# Altium PCB PCB1.PcbDoc
Units mil, origin at the board's own origin, x right, y up, seen from the top; angles counter-clockwise.
Board outline 3908.26 x 3899.5 mil, 2 copper layers (Top Layer, Bottom Layer); 71 components, 67 nets, 234 pads, 126 vias.
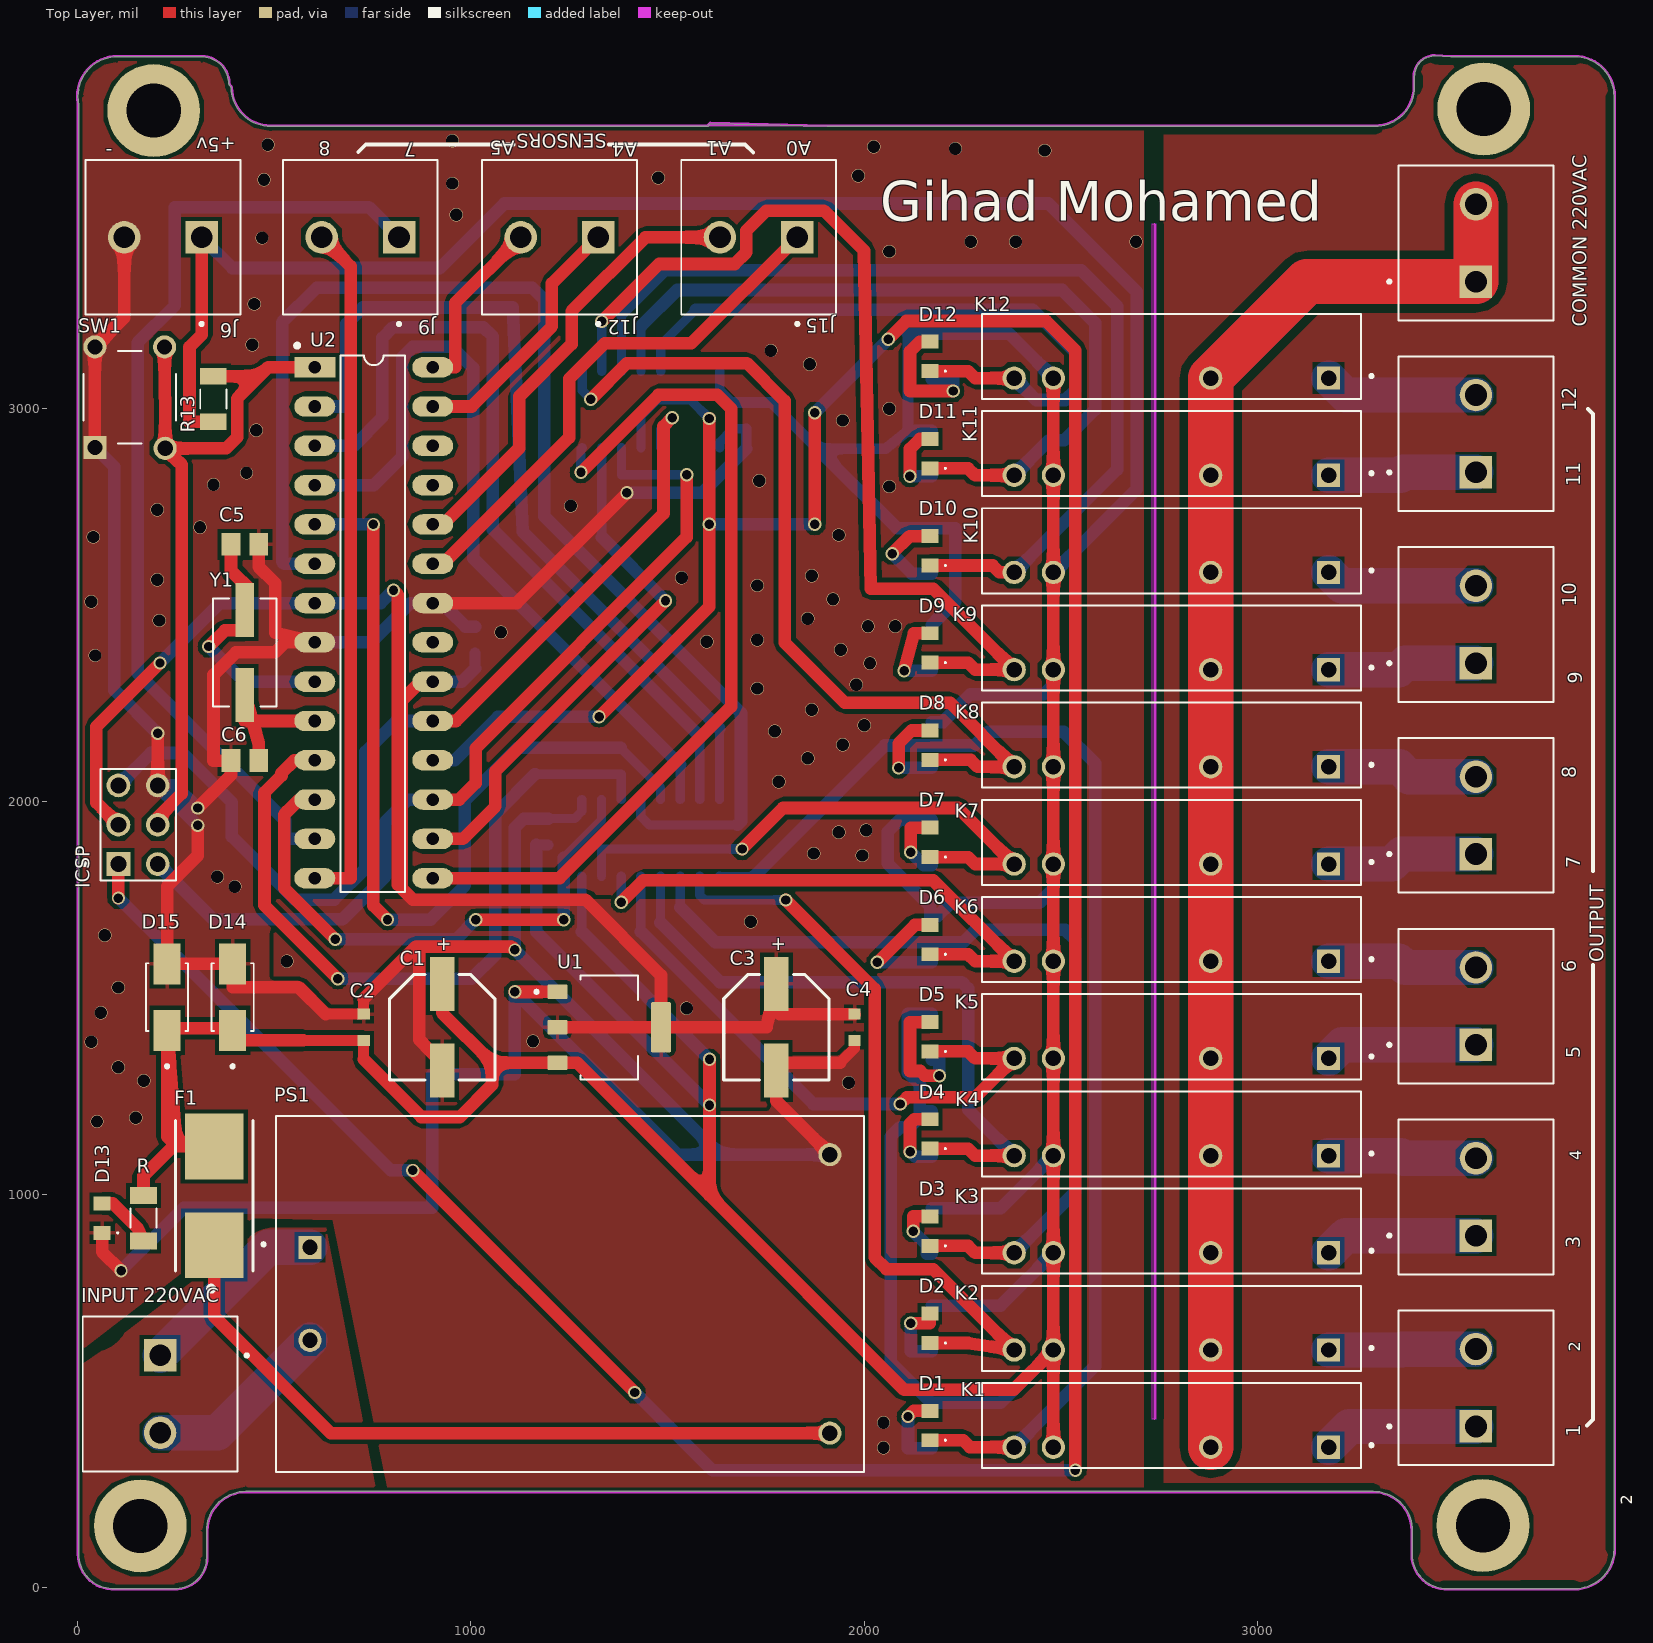
[diagram p0: Top Layer view]
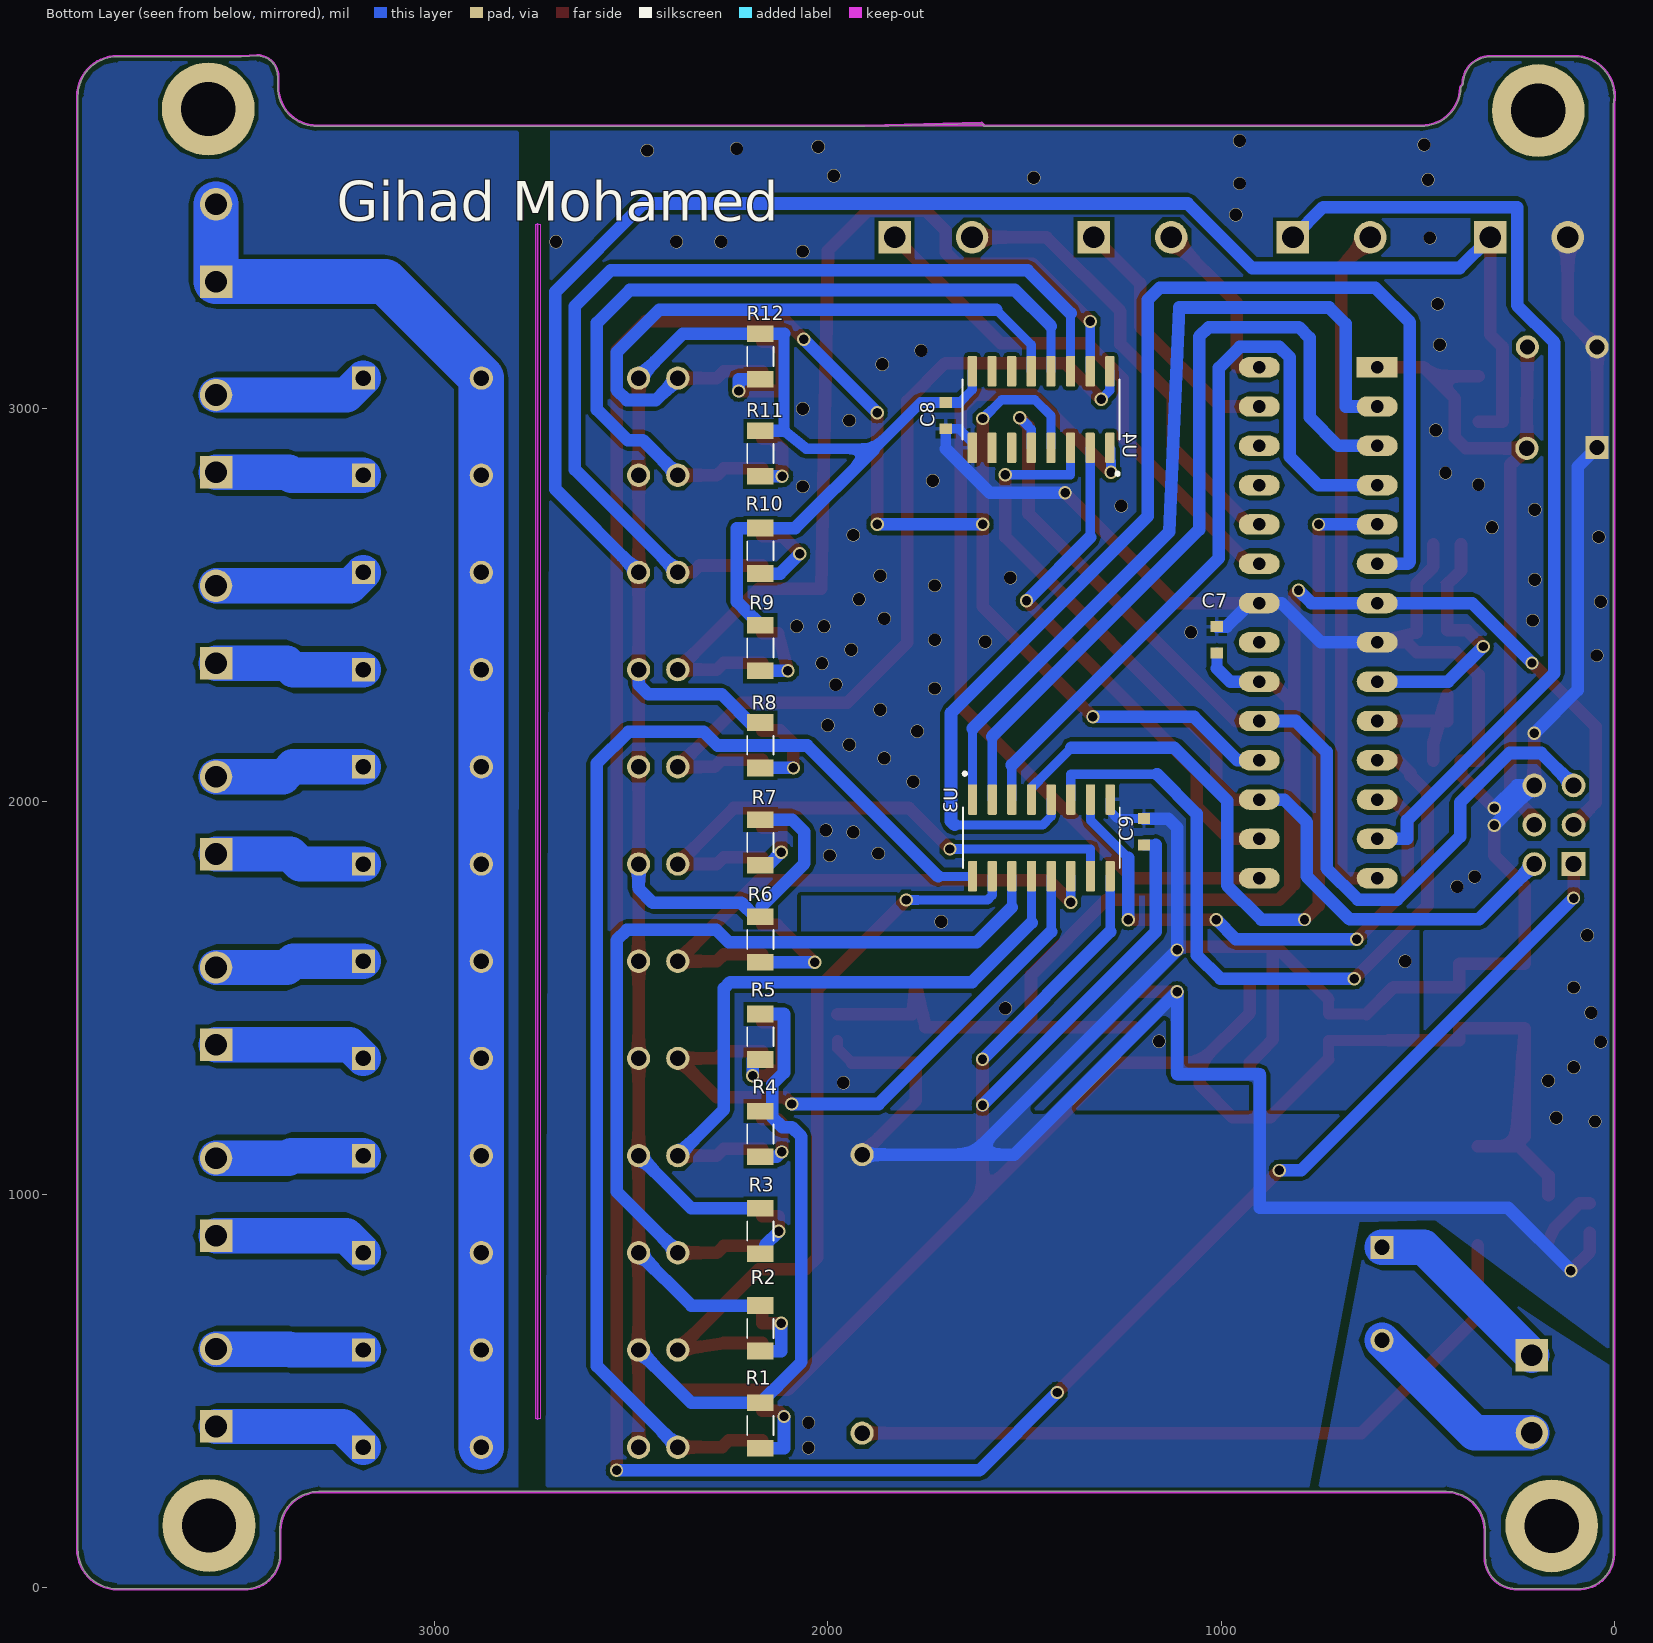
[diagram p1: Bottom Layer view, seen from below]
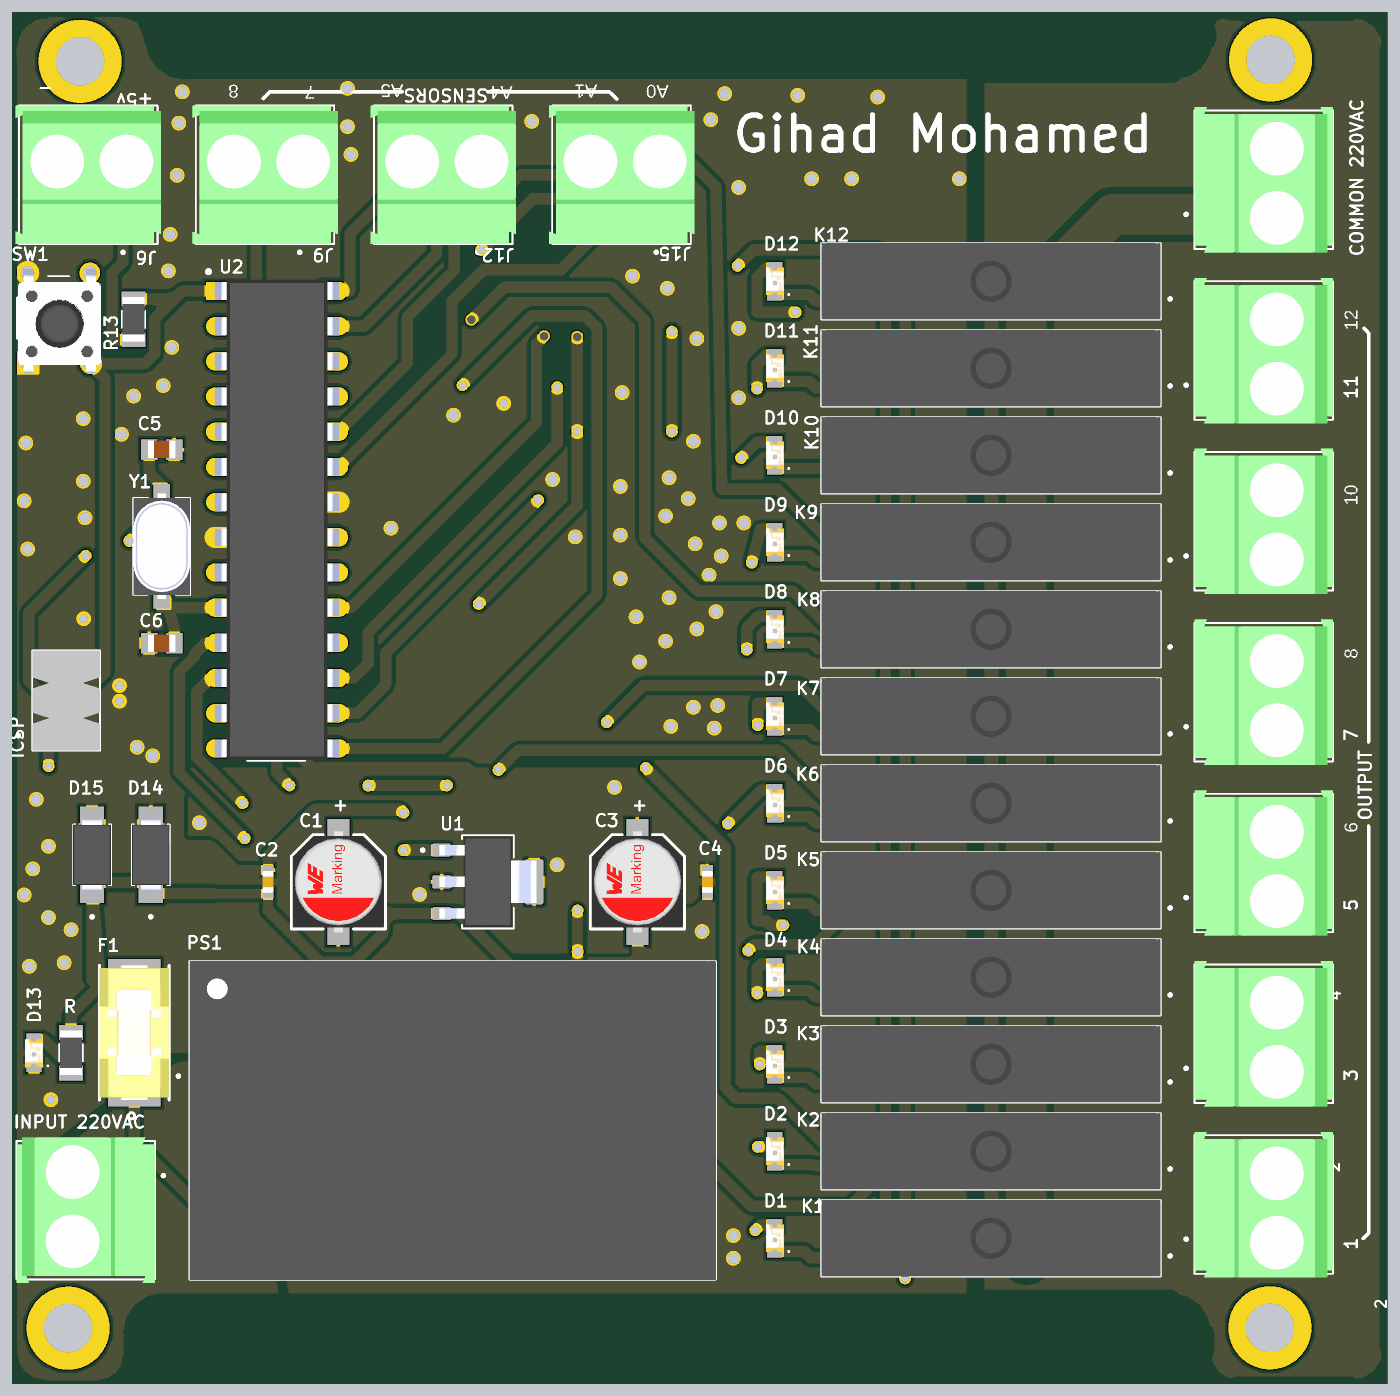
[diagram p2: 3D render of the assembled board from above, using the file's embedded part models]
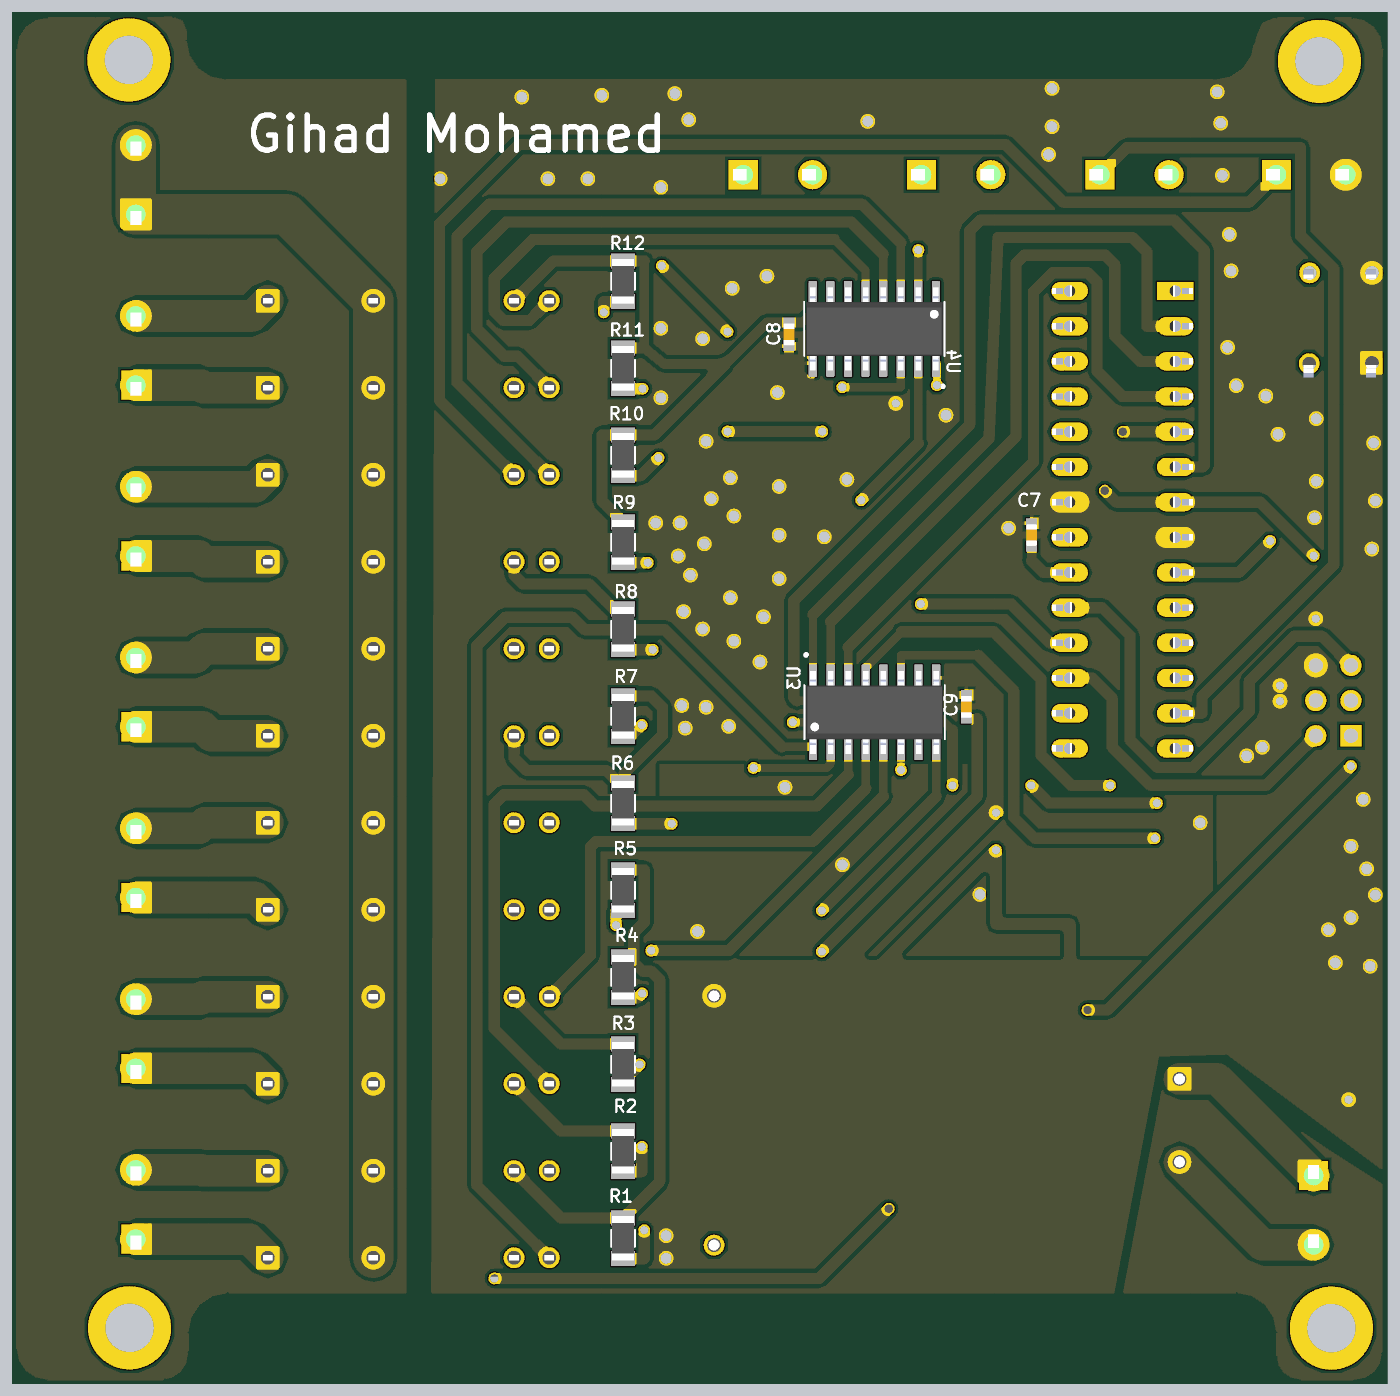
[diagram p3: 3D render of the assembled board from below, using the file's embedded part models]

## Layer stack, top to bottom
Top Solder: solder mask 0.4, Solder Resist, Dk 3.5
Top Layer: signal copper 1.4
Dielectric 1: dielectric 12.6, FR-4, Dk 4.8
Bottom Layer: signal copper 1.4
Bottom Solder: solder mask 0.4, Solder Resist, Dk 3.5

## Board outline
3808.24,-2.96 ccw(c3808.24,97.04) 3908.24,97.04 3908.24,341.68 3908.24,3543.86 3908.24,3794.27 ccw(c3808.24,3794.27) 3808.24,3894.27 3699.3,3894.27 3492.57,3894.27 3452.15,3896.54 ccw(c3452.15,3844.71) 3400.33,3844.71 3400.33,3817.49 cw(c3300.33,3817.49) 3300.33,3717.49 1904.68,3717.49 1609.28,3724.49 1602.28,3717.49 489.93,3717.49 cw(c489.93,3817.49) 389.94,3816.03 383.61,3825.17 ccw(c314.51,3825.17) 314.51,3894.27 99.99,3894.27 ccw(c99.99,3794.27) -0.01,3794.27 1.77,3770.53 1.77,85.03 ccw(c89.84,85.03) 93.57,-2.96 245.43,-2.96 ccw(c247.43,77.16) 327.55,75.18 327.55,144.35 cw(c427.53,144.36) 427.55,244.35 3295.14,244.35 cw(c3295.14,144.36) 3395.14,144.35 3395.14,90.5 ccw(c3481.95,83.85) 3475.3,-2.96
cut-out: 2732.17,429 2743.5,429 2743.5,3444.85 2743.5,3468.13 2743.88,3468.51 2732.17,3468.51

## Design rules (kind name [scope] priority, off if disabled: settings)
Clearance Clearance_1 [InNamedPolygon('NONET_L02_P034') vs InNet('No Net') And OnLayer('Top Layer')] p1: gap=10 ignorepadtopadclearanceinfootprint=FALSE except(0: Arc-Hole Track-Hole SMDPad-Hole THPad-Hole Via-Hole Fill-Hole Poly-Hole Region-Hole Text-Hole; 20: Track-Poly)
Clearance NONET_L01_P032 [InNamedPolygon('NONET_L01_P032')] p2: gap=10 ignorepadtopadclearanceinfootprint=FALSE except(0: Arc-Hole Track-Hole SMDPad-Hole THPad-Hole Via-Hole Fill-Hole Poly-Hole Region-Hole Text-Hole; 20: Track-Poly)
Clearance [All] p3: gap=10 ignorepadtopadclearanceinfootprint=FALSE except(0: Text-Text; 5: THPad-Via; 18: Arc-Arc Arc-Track Track-Track)
HoleSize [All] p1: absolutevalues=TRUE maxlimit=137.8 minlimit=11.81 maxpercent=80.000 minpercent=20.000
MinimumSolderMaskSliver [All] p1: minsoldermaskwidth=1
PolygonConnect [All] p1: thpad.connectstyle=Direct thpad.reliefconductorwidth=10 thpad.reliefentries=4 thpad.polygonreliefangle="90 Angle" thpad.airgapwidth=10 smdpad.connectstyle=Relief smdpad.reliefconductorwidth=10 smdpad.reliefentries=4 smdpad.polygonreliefangle="90 Angle" smdpad.airgapwidth=10 via.connectstyle=Direct via.reliefconductorwidth=10 via.reliefentries=4 via.polygonreliefangle="90 Angle" via.airgapwidth=10
RoutingVias [All] p1: holewidth=24 width=33.8 viastyle="Through Hole" minholewidth=24 minwidth=33.8 maxholewidth=31.5 maxwidth=33.8
SMDNeckDown [All] p1: percent=150.000
SilkToSilkClearance [All] p1: silktosilkclearance=0
SilkToSolderMaskClearance [IsPad] p1: minsilkscreentomaskgap=1 clearancetoexposedcopper=TRUE
SolderMaskExpansion [All] p1: expansion=4 istentingtop=FALSE
Width [All] p1: maxlimit=115 minlimit=16 preferedwidth=32 minimp=50.000000 maximp=50.000000 favimp=50.000000
26 further rules are at their usual default settings.

## Classes and differential pairs
component class control: C5 C6 C7 C8 C9 ICSP R13 SW1 U2 U3 U4 Y1
component class output: 1 3 5 7 9 11 "COMMON 220VAC" D1 D2 D3 D4 D5 D6 D7 D8 D9 D10 D11 D12 J6 J9 J12 J15 K1 K2 K3 K4 K5 K6 K7 K8 K9 K10 K11 K12 R1 R2 R3 R4 R5 R6 R7 R8 R9 R10 R11 R12
component class input: C1 C2 C3 C4 D13 D14 D15 F1 "INPUT 220VAC" PS1 R U1

## Components (designator, comment, footprint, x,y, rotation, side; value= is the part's Value field where it differs from the comment)
1 "282856-2" TE_282856-2 3556.85,508.12 r90 top
3 "282856-2" TE_282856-2 3556.85,993.57 r90 top
5 "282856-2" TE_282856-2 3556.85,1479.01 r90 top
7 "282856-2" TE_282856-2 3556.85,1964.45 r90 top
9 "282856-2" TE_282856-2 3556.85,2449.89 r90 top
11 "282856-2" TE_282856-2 3556.85,2935.33 r90 top
C1 "47uF" WCAP-ASLI_D6.3H7.7 926.85,1425.25 r90 top
C2 "100nF" WCAP-CSGP_0603_L1.6W0.8H0.8_Wave 726.85,1425.25 r270 top
C3 "47uF" WCAP-ASLI_D6.3H7.7 1776.85,1425.25 r90 top
C4 "100nF" WCAP-CSGP_0603_L1.6W0.8H0.8_Wave 1975.81,1425.25 r90 top
C5 "22pF" CAPC2012X130N 424.76,2653.82 r180 top value=C?
C6 "22pF" CAPC2012X130N 424.76,2103.82 r0 top
C7 "100nF" WCAP-CSGP_0603_L1.6W0.8H0.8_Wave 1010.58,2411.15 r270 bottom
C8 "100nF" WCAP-CSGP_0603_L1.6W0.8H0.8_Wave 1700.26,2981.39 r90 bottom
C9 "100nF" WCAP-CSGP_0603_L1.6W0.8H0.8_Wave 1195.93,1922.67 r270 bottom
"COMMON 220VAC" "282856-2" TE_282856-2 3556.85,3420.77 r90 top
D1 "Infrared, 1.4V, 140°" WL-SICW_0805_L2W1.3H0.8 2167.42,412.04 r90 top
D2 "Infrared, 1.4V, 140°" WL-SICW_0805_L2W1.3H0.8 2167.42,659.31 r90 top
D3 "Infrared, 1.4V, 140°" WL-SICW_0805_L2W1.3H0.8 2167.42,906.59 r90 top
D4 "Infrared, 1.4V, 140°" WL-SICW_0805_L2W1.3H0.8 2167.42,1153.86 r90 top
D5 "Infrared, 1.4V, 140°" WL-SICW_0805_L2W1.3H0.8 2167.42,1401.13 r90 top
D6 "Infrared, 1.4V, 140°" WL-SICW_0805_L2W1.3H0.8 2167.42,1648.41 r90 top
D7 "Infrared, 1.4V, 140°" WL-SICW_0805_L2W1.3H0.8 2167.42,1895.68 r90 top
D8 "Infrared, 1.4V, 140°" WL-SICW_0805_L2W1.3H0.8 2167.42,2142.95 r90 top
D9 "Infrared, 1.4V, 140°" WL-SICW_0805_L2W1.3H0.8 2167.42,2390.22 r90 top
D10 "Infrared, 1.4V, 140°" WL-SICW_0805_L2W1.3H0.8 2167.42,2637.5 r90 top
D11 "Infrared, 1.4V, 140°" WL-SICW_0805_L2W1.3H0.8 2167.42,2884.77 r90 top
D12 "Infrared, 1.4V, 140°" WL-SICW_0805_L2W1.3H0.8 2167.42,3132.04 r90 top
D13 "Infrared, 1.4V, 140°" WL-SICW_0805_L2W1.3H0.8 61.85,939.64 r90 top
D14 "S1G" DIO_S1G 393.66,1502.04 r90 top
D15 "S1G" DIO_S1G 226.85,1502.04 r90 top
F1 "0154004.DR" FUSE_0154004.DR 346.85,996.45 r90 top
ICSP "5-146257-3" TE_5-146257-3 153.09,1940.53 r90 top
"INPUT 220VAC" "282856-2" TE_282856-2 209.13,492.04 r270 top
J6 "282856-2" TE_282856-2 216.32,3435.11 r180 top
J9 "282856-2" TE_282856-2 718.52,3435.11 r180 top
J12 "282856-2" TE_282856-2 1225.19,3435.11 r180 top
J15 "282856-2" TE_282856-2 1731.85,3435.11 r180 top
K1 "Relay 5vDC/220AC" RELAY_G3MB-202PDC5 2781.85,412.04 r180 top
K2 "Relay 5vDC/220AC" RELAY_G3MB-202PDC5 2781.85,659.31 r180 top
K3 "Relay 5vDC/220AC" RELAY_G3MB-202PDC5 2781.85,906.59 r180 top
K4 "Relay 5vDC/220AC" RELAY_G3MB-202PDC5 2781.85,1153.86 r180 top
K5 "Relay 5vDC/220AC" RELAY_G3MB-202PDC5 2781.85,1401.13 r180 top
K6 "Relay 5vDC/220AC" RELAY_G3MB-202PDC5 2781.85,1648.41 r180 top
K7 "Relay 5vDC/220AC" RELAY_G3MB-202PDC5 2781.85,1895.68 r180 top
K8 "Relay 5vDC/220AC" RELAY_G3MB-202PDC5 2781.85,2142.95 r180 top
K9 "Relay 5vDC/220AC" RELAY_G3MB-202PDC5 2781.85,2390.22 r180 top
K10 "Relay 5vDC/220AC" RELAY_G3MB-202PDC5 2781.85,2637.5 r180 top
K11 "Relay 5vDC/220AC" RELAY_G3MB-202PDC5 2781.85,2884.77 r180 top
K12 "Relay 5vDC/220AC" RELAY_G3MB-202PDC5 2781.85,3132.04 r180 top
PS1 "HLK-5M05" CONV_HLK-5M05 1251.85,747.04 r0 top
R "FCR1206J10R" RESC3216X70N 166.85,939.64 r270 top
R1 "1k" RESC3216X70N 2171.85,412.04 r90 bottom
R2 "1k" RESC3216X70N 2171.85,659.31 r90 bottom
R3 "1k" RESC3216X70N 2171.85,906.59 r90 bottom
R4 "1k" RESC3216X70N 2171.85,1153.86 r90 bottom
R5 "1k" RESC3216X70N 2171.85,1401.13 r90 bottom
R6 "1k" RESC3216X70N 2171.85,1648.41 r90 bottom
R7 "1k" RESC3216X70N 2171.85,1895.68 r90 bottom
R8 "1k" RESC3216X70N 2171.85,2142.95 r90 bottom
R9 "1k" RESC3216X70N 2171.85,2390.22 r90 bottom
R10 "1k" RESC3216X70N 2171.85,2637.5 r90 bottom
R11 "1k" RESC3216X70N 2171.85,2884.77 r90 bottom
R12 "1k" RESC3216X70N 2171.85,3132.04 r90 bottom
R13 "10k" RESC3216X70N 344.69,3023.88 r90 top
SW1 "3-1825910-1" TE_3-1825910-1 131.85,3028.16 r90 top
U1 "AMS1117" SOT229P700X180-4N 1351.85,1425.25 r0 top
U2 "ATMEGA328P-PU" DIL28 752.71,2454.53 r0 top
U3 "ULN2003AD" SOIC127P600X175-16N 1457.1,1907.25 r270 bottom
U4 "ULN2003AD" SOIC127P600X175-16N 1457.75,2996.81 r90 bottom
Y1 "" XTAL_ECS-160-20-3X-TR 424.76,2378.82 r90 top

## Footprints (in the part's own frame and the unit in brackets; to place one, negate y for a bottom-side part, rotate by r counter-clockwise, add the part's x,y. Pads: shape width x height; smd on the part's side, far side on the other; paste and mask are expansions set on the pad)
CAPC2012X130N [mm]
  rect 1.21x1.47 smd: 1(-0.898,0) 2(0.898,0)
  body extent -1,-0.66 1,0.64, height 1.26
CONV_HLK-5M05 [mm]
  rect 1.5x1.5 / inner round 1.5 / far side rect 1.5x1.5 hole 1: 1(-16.8,3)
  round 1.5 hole 1: 2(-16.8,-3) 3(16.8,9) 4(16.8,-9)
  silkscreen extent -19.9,-11.5 19,11.5, body extent -19,-11.5 19,11.5, height 18.01
DIL28 [mil]
  rect 104x52 hole 32 paste-99999: 1(-150,650)
  oval 104x52 hole 32: 2(-150,550) 3(-150,450) 4(-150,350) 5(-150,250) 6(-150,150) 7(-150,50) 8(-150,-50) 9(-150,-150) 10(-150,-250) 11(-150,-350) 12(-150,-450) 13(-150,-550) 14(-150,-650) 15(150,-650) 16(150,-550) 17(150,-450) 18(150,-350) 19(150,-250) 20(150,-150) 21(150,-50) 22(150,50) 23(150,150) 24(150,250) 25(150,350) 26(150,450) 27(150,550) 28(150,650)
  silkscreen extent -200,-685 80,710, body extent -200,-682 200,682, height 180
DIO_S1G [mm]
  rect 2.65x1.75 smd: 1(-2.15,0) 2(2.15,0)
  silkscreen extent -4.57,-1.36 2.19,1.36, body extent -2.6,-1.36 2.6,1.36, height 2.7
FUSE_0154004.DR [mm]
  rect 4.24x3.81 smd: 1(-3.19,0) 2(3.19,0)
  silkscreen extent -6.22,-2.52 4.86,2.52, body extent -4.86,-2.51 4.86,2.51, height 3.81
RELAY_G3MB-202PDC5 [mm]
  rect 1.508x1.508 hole 1: 1(-10.16,1.4)
  round 1.508 hole 1: 2(-2.54,1.4) 3(7.62,1.4) 4(10.16,1.4)
  silkscreen extent -13.03,-2.75 12.25,2.75, body extent -12.25,-2.75 12.25,2.75, height 20.5
RESC3216X70N [mm]
  rect 1.08x1.72 smd: 1(-1.47,0) 2(1.47,0)
  silkscreen extent -0.61,-0.85 0.61,0.85, body extent -1.6,-0.8 1.6,0.8, height 0.71
SOIC127P600X175-16N [mm]
  rrect25% 1.97x0.6 smd: 1(-2.475,-4.445) 2(-2.475,-3.175) 3(-2.475,-1.905) 4(-2.475,-0.635) 5(-2.475,0.635) 6(-2.475,1.905) 7(-2.475,3.175) 8(-2.475,4.445) 9(2.475,4.445) 10(2.475,3.175) 11(2.475,1.905) 12(2.475,0.635) 13(2.475,-0.635) 14(2.475,-1.905) 15(2.475,-3.175) 16(2.475,-4.445)
  silkscreen extent -4.24,-5.06 1.95,5.06, body extent -3,-4.95 3,4.95, height 1.75
SOT229P700X180-4N [mm]
  rrect15% 1.31x0.93 smd: 1(-3.345,2.29) 2(-3.345,0) 3(-3.345,-2.29)
  rrect15% 1.31x3.24 smd: 4(3.345,0)
  silkscreen extent -4.8,-3.36 1.86,3.36, body extent -3.5,-3.25 3.5,3.25, height 1.8
TE_3-1825910-1 [mm]
  rect 1.498x1.498 / inner round 1.498 / far side rect 1.498x1.498 hole 0.99: 1(-3.25,2.25)
  round 1.498 hole 0.99: 2(3.25,2.25) 3(-3.302,-2.286) 4(3.25,-2.25)
  silkscreen extent -3,-3 3,3, body extent -4.32,-3.07 3.48,2.92, height 17.01
TE_5-146257-3 [mm]
  rect 1.53x1.53 / inner round 1.53 / far side rect 1.53x1.53 hole 1.02: 1(-2.54,1.27)
  round 1.53 hole 1.02: 2(0,1.27) 3(2.54,1.27) 4(-2.54,-1.27) 5(0,-1.27) 6(2.54,-1.27)
  silkscreen extent -3.61,-2.44 3.61,3.54, body extent -3.61,-2.44 3.61,2.44, height 8.38
TE_282856-2 [mm]
  rect 2.1x2.1 / inner round 2.1 / far side rect 2.1x2.1 hole 1.4: 1(-2.5,0)
  round 2.1 hole 1.4: 2(2.5,0)
  silkscreen extent -5,-5 5,5.7, body extent -5.25,-5 5.25,5, height 19
WCAP-ASLI_D6.3H7.7 [mm] "Aluminium Electrolytic V-Chip SMT Capacitors, 6.3x7.7mm"
  rect 3.5x1.6 smd: 1(2.8,0) 2(-2.8,0)
  silkscreen extent -3.4,-3.4 3.4,3.4, body extent -3.65,-3.3 3.65,3.3, height 7.7
WCAP-CSGP_0603_L1.6W0.8H0.8_Wave [mm] "Ceramic Capacitors, 0603, body 1.6x0.8mm"
  rect 0.7x0.8 smd: 1(-0.85,0) 2(0.85,0)
  body extent -0.8,-0.4 0.8,0.4, height 0.8
WL-SICW_0805_L2W1.3H0.8 [mm] "SMT Infrared Chip LED Waterclear, body 2x1.3mm"
  rect 0.9x1.1 smd: 1(-0.95,0) 2(0.95,0)
  silkscreen extent -1,-1.05 -0.9,-0.95, body extent -1,-0.65 1,0.65, height 0.8
XTAL_ECS-160-20-3X-TR [mm]
  rect 3.5x1.2 smd: 1(-2.75,0) 2(2.75,0)
  silkscreen extent -3.5,-2.05 3.5,2.05, body extent -3.8,-2.05 3.8,2.05, height 2.31

## Part data
1 3 5 7 9 11 "COMMON 220VAC" "INPUT 220VAC" J6 J9 J12 J15: "TERMI-BLOK PCB MOUNT 2P", Package=None, Availability="In Stock", Check_prices=https://www.snapeda.com/parts/282856-2/TE+Connectivity+AMP+Connectors/view-part/?ref=eda, EU_RoHS_Compliance="Compliant with Exemptions", MF="TE Connectivity", MP=282856-2, Price=None, Purchase-URL=https://pricing.snapeda.com/search/part/282856-2/?ref=eda, SnapEDA_Link=https://www.snapeda.com/parts/282856-2/TE+Connectivity+AMP+Connectors/view-part/?ref=snap
C1 C3: library part 865080443007, "WCAP-ASLI Aluminum Electrolytic Capacitor, V-Chip, D6.3 x H5.5mm, 47uF, 25V", Capacitance Tolerance=+/-20%, Leakage Current=11.75uA, Manufacturer="Wurth Elektronik", Operating Temperature Max=105°C, Operating Temperature Min=-55°C, Rated Voltage (DC)=25V, Ripple Current=220mA, Capacitance=47uF, Category="Aluminum Electrolytic Capacitors", ComponentLink1Description="Website Link", ComponentLink1URL=https://www.we-online.com/redexpert/article/865080443007?ad, ComponentLink2Description="Datasheet Link", ComponentLink2URL=https://www.we-online.com/redexpert/spec/865080443007?ad, Diameter=6.3mm, Dissipation Factor=14%, Endurance=2000h, Height=5.5mm, Manufacturer Part Number=865080443007, Match Code=WCAP-ASLI, Mount="Surface Mount", Packaging="Tape and Reel", Technical Reference=ASED055470M025DVCTBB000
C2 C4 C7 C8 C9: library part 885012206071, "WCAP-CSGP Multilayer Ceramic Chip Capacitor, General Purpose, size 0603, X7R, 100nF, 25VDC", Capacitance Tolerance=+/-10%, Case/Size Code=0603, Insulation Resistance=5GΩ, Manufacturer="Wurth Elektronik", Operating Temperature Max=125°C, Operating Temperature Min=-55°C, Rated Voltage (DC)=25V, Capacitance=100nF, Category="Multilayer Ceramic Chip Capacitors", Ceramic Type=X7R, ComponentLink1Description="Website Link", ComponentLink1URL=https://www.we-online.com/redexpert/article/885012206071?ad, ComponentLink2Description="Datasheet Link", ComponentLink2URL=https://www.we-online.com/redexpert/spec/885012206071?ad, Dissipation Factor=3.5%, Height=0.8mm, Length=1.6mm, Manufacturer Part Number=885012206071, Match Code=WCAP-CSGP, Mount="Surface Mount", Packaging="Tape and Reel", Technical Reference=X7R0603104K025DFCT10000, Width=0.8mm
C5 C6: library part 0805Y0500220JCT, "Cap Cer 22pf 50v C0g/Np0 0805", Package="2012 Knowles Syfer", Availability=Warning, BuyPart=https://www.snapeda.com/parts/0805Y0500220JCT/Syfer/view-part/1818858/?ref=eda, MF=Syfer, Mouser-Purchase-URL=https://snapeda.com/shop?store=Mouser&id=1818858, MP=0805Y0500220JCT, Price=None, SnapEDA_Link=https://www.snapeda.com/parts/0805Y0500220JCT/Syfer/view-part/1818858/?ref=snap
D1 D2 D3 D4 D5 D6 D7 D8 D9 D10 D11 D12 D13: library part 15412085BA400, "WL-SICW SMT Chip LED Infrared Waterclear, size 1206, Infrared, 1.4V, 140°", Case/Size Code=1206, Emitting Color=Infrared, Forward Voltage=1.4V, Forward Voltage Max=2V, Manufacturer="Wurth Elektronik", Operating Temperature Max=85°C, Operating Temperature Min=-40°C, Category="Infrared LEDs", Centroid Wavelength=850nm, Chip Technology=AlGaAs, ComponentLink1Description="Website Link", ComponentLink1URL=https://www.we-online.com/redexpert/article/15412085BA400?ad, ComponentLink2Description="Datasheet Link", ComponentLink2URL=https://www.we-online.com/redexpert/spec/15412085BA400?ad, Height=1.1mm, Length=3.2mm, Manufacturer Part Number=15412085BA400, Match Code=WL-SICW, Mount="Surface Mount", Packaging="Tape and Reel", Peak Wavelength=850nm, Radiant Intensity=2.5mW/sr, Radiant Intensity Min=1mW/sr, Viewing Angle=140°, Width=1.6mm
D14 D15: "Diode Standard 400 V 1A Surface Mount DO-214AC (SMA)", Package="SMA Taiwan Semiconductor", Availability="In Stock", Check_prices=https://www.snapeda.com/parts/S1G/Onsemi/view-part/?ref=eda, MF="ON Semiconductor", MP=S1G, Price=None, Purchase-URL=https://pricing.snapeda.com/search/part/S1G/?ref=eda, SnapEDA_Link=https://www.snapeda.com/parts/S1G/Onsemi/view-part/?ref=snap
F1: "154/154T/154L/154TL Series OMNI-BLOKÂ® Fuse and Holder Assembly", Package=None, Availability=Unavailable, MP=0154004.DR, Price=None
ICSP: "Header; Breakaway; 0.100 x 0.100 in.; PC Board; Dual; 6; 0.025 in.; 0.12 in.", Package=None, Availability="In Stock", Check_prices=https://www.snapeda.com/parts/5-146257-3/TE+Connectivity+AMP+Connectors/view-part/?ref=eda, EU_RoHS_Compliance=Compliant, MF="TE Connectivity", MP=5-146257-3, Price=None, Purchase-URL=https://pricing.snapeda.com/search/part/5-146257-3/?ref=eda, SnapEDA_Link=https://www.snapeda.com/parts/5-146257-3/TE+Connectivity+AMP+Connectors/view-part/?ref=snap
K1 K2 K3 K4 K5 K6 K7 K8 K9 K10 K11 K12: library part G3MB-202PDC5, "Solid State SPST-NO (1 Form A) 4-SIP", Package=None, Availability="Not in stock", Check_prices=https://www.snapeda.com/parts/G3MB-202P%20DC5/Omron+Automation+and+Safety/view-part/?ref=eda, MF="Omron Automation", MP="G3MB-202P DC5", Price=None, SnapEDA_Link=https://www.snapeda.com/parts/G3MB-202P%20DC5/Omron+Automation+and+Safety/view-part/?ref=snap
PS1: "AC DC 220V to 5V 5W 5Watt Isolated Switching Step-Down Power Supply Module Converter", Package=Package, Availability="Not in stock", Check_prices=https://www.snapeda.com/parts/HLK-5M05/Hi-link/view-part/?ref=eda, MF=Hi-link, MP=HLK-5M05, Price=None, SnapEDA_Link=https://www.snapeda.com/parts/HLK-5M05/Hi-link/view-part/?ref=snap
R: "Res 1206 10 Ohm 5% 1/8W Â±500ppm/Â°C Molded SMD SMD T/R", Package=1206, Power_Rating=".125 W", Resistance=10, Tolerance=5%, Availability=Warning, DigiKey-Purchase-URL=https://snapeda.com/shop?store=DigiKey&id=988597, EU_RoHS_Compliance="Compliant with Exemptions", MF="TE Connectivity", Mouser-Purchase-URL=https://snapeda.com/shop?store=Mouser&id=988597, MP=FCR1206J10R, Price=None, SnapEDA_Link=https://www.snapeda.com/parts/FCR1206J10R/TE%20Connectivity%20Passive%20Product/view-part/988597/?ref=snap
R1 R2 R3 R4 R5 R6 R7 R8 R9 R10 R11 R12 R13: library part FCR1206J10R, "Res 1206 10 Ohm 5% 1/8W Â±500ppm/Â°C Molded SMD SMD T/R", Package=1206, Power_Rating=".125 W", Resistance=10, Tolerance=5%, Availability=Warning, DigiKey-Purchase-URL=https://snapeda.com/shop?store=DigiKey&id=988597, EU_RoHS_Compliance="Compliant with Exemptions", MF="TE Connectivity", Mouser-Purchase-URL=https://snapeda.com/shop?store=Mouser&id=988597, MP=FCR1206J10R, Price=None, SnapEDA_Link=https://www.snapeda.com/parts/FCR1206J10R/TE%20Connectivity%20Passive%20Product/view-part/988597/?ref=snap
SW1: "Switch Push Button OFF (ON) SPST Round Button 0.05A 24VDC Momentary Contact PC Pins Thru-Hole", Package=None, Availability="In Stock", Check_prices=https://www.snapeda.com/parts/3-1825910-1/TE+Connectivity+ALCOSWITCH+Switches/view-part/?ref=eda, MF="TE Connectivity", MP=3-1825910-1, Price=None, Purchase-URL=https://pricing.snapeda.com/search/part/3-1825910-1/?ref=eda, SnapEDA_Link=https://www.snapeda.com/parts/3-1825910-1/TE+Connectivity+ALCOSWITCH+Switches/view-part/?ref=snap
U1: "1A LOW DROPOUT VOLTAGE REGULATOR SOT-223", Package="SOT-223 Seeed Technology", Availability="Not in stock", Check_prices=https://www.snapeda.com/parts/AMS1117/Advanced+Monolithic+Systems/view-part/?ref=eda, MF="Advanced Monolithic Systems", MP=AMS1117, Price=None, SnapEDA_Link=https://www.snapeda.com/parts/AMS1117/Advanced+Monolithic+Systems/view-part/?ref=snap
U2: "ATmega Series 20 MHz 32 KB Flash 2 KB SRAM 8-Bit Microcontroller - DIP-28", Package=None, Availability=Unavailable, MP=ATMEGA328P-PU, Price=None
U3 U4: "50-V, 7-ch darlington transistor array, -20C to 70C", Package="SOIC-16 Texas Instruments", Availability="In Stock", Check_prices=https://www.snapeda.com/parts/ULN2003AD/Texas+Instruments/view-part/?ref=eda, MF="Texas Instruments", MP=ULN2003AD, Price=None, Purchase-URL=https://pricing.snapeda.com/search/part/ULN2003AD/?ref=eda, SnapEDA_Link=https://www.snapeda.com/parts/ULN2003AD/Texas+Instruments/view-part/?ref=snap
Y1: library part ECS-160-20-3X-TR, "16MHz Â±30ppm Crystal 20pF 50 Ohms HC-49/US", Package="HC49/US ECS International", Digi-Key_Part_Number=XC1776CT-ND, Digi-Key_Purchase_URL=https://www.digikey.com/product-detail/en/ecs-inc/ECS-160-20-3X-TR/XC1776CT-ND/2676640?utm_source=snapeda&utm_medium=aggregator&utm_campaign=symbol, MF="ECS Inc.", MP=ECS-160-20-3X-TR, SnapEDA_Link=https://www.snapeda.com/parts/ECS-160-20-3X-TR/ECS%20Inc./view-part/561589/?ref=snap

## Free pads (board coordinates)
  round 236.22 hole 137.8: 4(158.7,156.69) 4(192.77,3757.36) 4(3574.66,157.64) 4(3576.64,3761.42)

## Via types
v1: diameter 33.8, hole 31.5, Top Layer to Bottom Layer, 76 vias
v2: diameter 33.8, hole 24, Top Layer to Bottom Layer, 50 vias

## Nets (pads, with @x,y where several pads share a name; then routed paths per layer and width w, separated by ;. In a path a pad name is that pad's centre, name@x,y a point inside that pad or via, vN(x,y) a via of type N, cw(c..) or ccw(c..) an arc to the next point about the centre after c; other vN are vias at no path point)
0: U2.2 U3.1 | length 2190.7
  Bottom Layer w23.62: U3.1 1632.1,2185.46
  Bottom Layer w32: U2.2 682.85,3004.53 682.85,3214.53 724.85,3256.53 1106.37,3256.53 1131.85,2685.71 1632.1,2185.46
1: U2.3 U3.2 | length 2101.9
  Bottom Layer w23.62: U3.2 1582.1,2164.75
  Bottom Layer w32: U2.3 701.85,2904.53 774.71,2977.39 774.71,3179.39 801.85,3206.53 1031.11,3206.53 1055.46,3182.18 1055.46,2691.39 1582.1,2164.75
2: U2.4 U3.3 | length 2035.3
  Bottom Layer w23.62: U3.3 1532.1,2092.42
  Bottom Layer w32: U2.4 752.85,2804.53 824.71,2876.39 824.71,3129.39 851.85,3156.53 951.85,3156.53 1005.46,3102.92 1005.46,2619.06 1532.1,2092.42
3: U2.5 U3.4 | length 2242.9
  Top Layer w32: v2(751.85,2704.53) 751.85,1735.04 v2(787.59,1699.3)
  Bottom Layer w23.62: 1380.61,2136.28 1482.1,2034.8 U3.4
  Bottom Layer w32: U2.5 v2(751.85,2704.53) ; v2(787.59,1699.3) 897.11,1699.3 984.28,1786.47 984.28,2001.71 1118.85,2136.28 1380.61,2136.28
4: U2.6 U3.5 | length 3254.7
  Bottom Layer w23.62: U3.5 1432.1,1961.8 1453.85,1940.04 1677.91,1940.04
  Bottom Layer w32: U2.6 524.85,2604.53 519.85,2609.53 519.85,3219.04 607.34,3306.53 1156.1,3306.53 1186.94,3275.69 1186.94,2724.87 1686.91,2224.9 1686.91,1949.04 1677.91,1940.04
5: U2.11 U3.6 | length 1927.5
  Top Layer w32: U2.11 550.34,2104.53 517.85,2072.04 517.85,2065.61 474.71,2022.47 474.71,1735.29 v2(660.96,1549.04)
  Bottom Layer w23.62: 1162.85,2069.04 1382.1,2069.04 U3.6
  Bottom Layer w32: v2(660.96,1549.04) 1001.85,1549.04 1061.85,1609.04 1061.85,1968.04 1162.85,2069.04
6: U2.12 U3.7 | length 1412.3
  Top Layer w32: U2.12 562.85,2004.53 524.71,1966.39 524.71,1779.18 v2(654.85,1649.04) ; v2(1011.85,1699.04) v2(1235.85,1699.04)
  Bottom Layer w23.62: 1235.85,1856.04 1332.1,1952.29 U3.7
  Bottom Layer w32: v2(654.85,1649.04) 961.85,1649.04 v2(1011.85,1699.04) ; v2(1235.85,1699.04) 1235.85,1856.04
7: J9.1 U2.13 | length 2480
  Bottom Layer w32: U2.13 526.85,1904.53 526.85,1951.67 151.85,2326.67 151.85,3167.04 246.85,3262.04 246.85,3512.04 740.01,3512.04 J9.1
8: J9.2 U2.14 | length 1752.3
  Top Layer w32: U2.14 693.85,1804.53 693.85,3361.35 J9.2
9: U2.15 U4.1 | length 2239.6
  Top Layer w32: U2.15 1225.34,1804.53 1661.85,2241.04 1661.85,2999.04 1626.85,3034.04 1476.85,3034.04 v2(1279.85,2837.04)
  Bottom Layer w23.62: v2(1279.85,2837.04) 1279.85,2896.47 U4.1
10: U2.16 U4.2 | length 1352.1
  Top Layer w32: U2.16 979.34,1904.53 1061.85,1987.04 1061.85,2077.04 v2(1494.85,2510.04)
  Bottom Layer w23.62: 1332.75,2672.15 U4.2
  Bottom Layer w32: 1332.75,2672.15 v2(1494.85,2510.04)
11: ICSP.4 U2.17 U4.3 | length 2332.5
  Top Layer w32: U2.17 969.85,2004.53 1011.85,2046.53 1011.85,2135.04 1548.85,2672.04 v2(1548.85,2831.04)
  Bottom Layer w23.62: U4.3 1382.75,2831.04 v2(1548.85,2831.04)
  Bottom Layer w32: ICSP.4 343.57,1700.04 672.56,1700.04 781.85,1809.33 781.85,1947.04 839.34,2004.53 U2.17
12: ICSP.1 U2.18 U4.4 | length 8952.4
  Top Layer w32: v2(103.09,1754.04) ICSP.1 ; v2(851.85,1061.04) v2(1416.85,496.04) ; v2(1325.85,2215.04) 1605.85,2495.04 v2(1605.85,2705.04) v2(1605.85,2974.04) ; v2(1874.85,2705.04) v2(1874.85,2989.04) ; v2(2061.85,3176.04) 2107.85,3222.04 2462.85,3222.04 2537.85,3147.04 v2(2537.85,298.04)
  Bottom Layer w23.62: U4.4 1432.75,2980.94 1473.85,3022.04 1557.85,3022.04 v2(1605.85,2974.04)
  Bottom Layer w32: v2(103.09,1754.04) 796.09,1061.04 v2(851.85,1061.04) ; U2.18 958.34,2104.53 1068.85,2215.04 v2(1325.85,2215.04) ; v2(1416.85,496.04) 1614.85,298.04 v2(2537.85,298.04) ; v2(1605.85,2705.04) v2(1874.85,2705.04) ; v2(1874.85,2989.04) v2(2061.85,3176.04)
13: ICSP.3 U2.19 U4.5 | length 2548.1
  Top Layer w32: U2.19 961.97,2204.53 1489.8,2732.36 1489.8,2954.09 v2(1511.75,2976.04)
  Bottom Layer w23.62: U4.5 1482.75,2947.04 v2(1511.75,2976.04)
  Bottom Layer w32: ICSP.3 185.6,2123.04 265.85,2123.04 391.85,1997.04 391.85,1910.04 551.85,1750.04 651.85,1750.04 731.35,1829.54 731.35,2125.54 810.34,2204.53 U2.19
+5: C1.1 C2.2 C8.2 C9.2 D14.1 D15.1 F1.2 J6.1 K1.3 K2.3 K3.3 K4.3 K5.3 K6.3 K7.3 K8.3 K9.3 K10.3 K11.3 K12.3 R1.2 R2.2 R3.2 R4.2 R5.2 R6.2 R7.2 R8.2 R9.2 R10.2 R11.2 R12.2 R13.1 R.1 U1.3 U3.9 U4.9 | length 17937.8
  Top Layer w27.56: 573.11,1391.79 C2.2 726.85,1343.99
  Top Layer w32: R.1 166.85,1047.04 246.85,1127.04 ; J6.1 314.74,3186.93 283.85,3156.04 283.85,2966.01 R13.1 ; F1.2 251.85,1122.04 ; 573.11,1391.79 572.85,1392.04 393.66,1392.04 D14.1 393.66,1423.15 226.85,1423.15 D15.1 ; 726.85,1343.99 873.8,1197.04 971.8,1197.04 1053.8,1279.04 1053.8,1335.09 ; C1.1 926.85,1462.04 1053.8,1335.09 ; v2(1606.91,1343.73) v2(1606.91,1227.23) 1606.91,997.99 ; K1.3 K2.3 ; K12.3 K11.3 K10.3 K9.3 K8.3 K7.3 K6.3 K5.3 K4.3 K3.3 K2.3 ; D15.1 226.85,1147.04 246.85,1127.04 ; D15.1 251.85,1122.04 ; 246.85,1127.04 251.85,1122.04 ; 1053.8,1335.09 U1.3 1269.8,1335.09 1606.91,997.99 ; 1606.91,997.99 2101.85,503.04 2380.7,503.04 K2.3
  Bottom Layer w23.62: 1282.1,1668.53 U3.9 ; U4.9 1632.75,3047.04 1664.94,3014.85
  Bottom Layer w27.56: 1165.57,1889.21 C9.2 ; 1664.94,3014.85 C8.2 1764.04,3014.85 1881.85,2897.04 2055.2,2897.04 2111.85,2942.64 2111.85,3189.92
  Bottom Layer w32: J6.1 392.81,3357.04 920.85,3357.04 1084.85,3521.04 2468.85,3521.04 2693.85,3296.04 2693.85,2794.38 K10.3 ; 1165.57,1889.21 1165.57,1668.57 v2(1606.91,1227.23) ; 1282.1,1668.53 v2(1606.91,1343.73) ; 1881.85,2897.04 2083.53,2695.37 R10.2 2231.85,2695.37 2231.85,2508.1 R9.2 ; 2111.85,2942.64 R11.2 ; 2111.85,3189.92 R12.2 2368.86,3189.92 K12.3 ; R2.2 2347.57,717.19 K3.3 ; R3.2 2347.57,964.46 K4.3 ; R4.2 R4.2@2141.85,1211.73 ; R5.2 2111.85,1459.01 2111.85,1309.77 2141.85,1279.77 R4.2@2141.85,1211.73 ; R7.2 2091.36,1953.55 2059.85,1922.04 2059.85,1842.04 2168.85,1733.04 2168.85,1706.28 R6.2 2184.85,1706.28 2220.62,1742.04 2445.85,1742.04 2481.85,1778.04 K7.3 ; R8.2 2198.85,2200.82 2270.07,2272.04 2456.85,2272.04 2481.85,2297.04 K9.3 ; K2.3 2347.57,469.92 R1.2 2067.85,573.92 2067.85,1147.04 2091.75,1170.94 2115.75,1170.94 2141.85,1197.04 R4.2@2141.85,1211.73
A0: J15.1 U2.23 | length 1359.2
  Top Layer w32: U2.23 928.85,2604.53 1249.85,2925.53 1249.85,3075.04 1339.85,3165.04 1560.21,3165.04 J15.1
A1: J15.2 U2.24 | length 1159.5
  Top Layer w32: U2.24 928.85,2704.53 1122.85,2898.53 1122.85,3030.04 1255.98,3163.17 1255.98,3247.04 1444.05,3435.11 J15.2
A2: U2.25
A3: U2.26
A4: J12.1 U2.27 | length 663
  Top Layer w32: U2.27 1001.85,3004.53 1205.98,3208.66 1205.98,3317.48 J12.1
A5: J12.2 U2.28 | length 456.7
  Top Layer w32: U2.28 959.62,3104.53 959.62,3267.97 J12.2
AC1: "INPUT 220VAC.1" PS1.1 | length 495.1
  Bottom Layer w90: 209.13,590.47 483.82,865.15 PS1.1
AC2: "INPUT 220VAC.2" PS1.2 | length 478.8
  Bottom Layer w90: 209.13,393.62 355.12,393.62 PS1.2
COMMON: "COMMON 220VAC.1" "COMMON 220VAC.2" K1.2 K2.2 K3.2 K4.2 K5.2 K6.2 K7.2 K8.2 K9.2 K10.2 K11.2 K12.2 | length 7387
  Top Layer w115: K1.2 K2.2 K3.2 K4.2 K5.2 K6.2 K7.2 K8.2 K9.2 K10.2 K11.2 K12.2 3127.27,3322.34 3556.85,3322.34 3556.85,3519.19
  Bottom Layer w115: K1.2 K2.2 K3.2 K4.2 K5.2 K6.2 K7.2 K8.2 K9.2 K10.2 K11.2 K12.2 3127.27,3322.34 3556.85,3322.34 3556.85,3519.19
GND: C1.2 C2.1 C3.2 C4.1 C5.1 C6.1 C7.1 C8.1 C9.1 D13.1 D14.2 D15.2 ICSP.6 J6.2 PS1.3 SW1.1 SW1.2 U1.1 U2.8 U2.22 U3.8 U4.8 | length 10796.2
  Top Layer w27.56: 630.18,1458.72 C2.1 726.85,1497.04 ; 1938.81,1335.04 1975.81,1372.04 C4.1
  Top Layer w32: SW1.1 SW1.2 117.89,3230.73 J6.2 ; D13.1 61.85,854.04 v2(109.85,806.04) ; ICSP.6 v2(203.09,2173.04) ; v2(304.85,1938.76) 304.85,1862.04 226.85,1784.04 D15.2 D14.2 393.66,1527.04 561.85,1527.04 630.18,1458.72 ; v2(304.85,1983.04) 389.4,2067.59 C6.1 344.85,2103.82 344.85,2322.04 401.85,2379.04 501.37,2379.04 526.85,2404.53 U2.8 501.85,2429.53 501.85,2555.04 460.11,2596.78 C5.1 ; 726.85,1497.04 860.2,1630.39 868.85,1630.39 ; U2.22 1116.34,2504.53 v2(1396.85,2785.04) ; C1.2 926.85,1335.04 868.85,1393.04 868.85,1630.39 ; v2(1111.85,1515.41) U1.1 ; v2(1111.85,1622.04) 1103.51,1630.39 868.85,1630.39 ; PS1.3 1776.85,1237.79 C3.2 1776.85,1335.04 1938.81,1335.04
  Bottom Layer w23.62: C9.1 1263.54,1956.13 1282.1,1974.69 U3.8 ; U4.8 1632.75,2913.78 1666.89,2947.92 C8.1
  Bottom Layer w27.56: 1700.26,2897.04 C8.1
  Bottom Layer w32: SW1.1 92.85,2850.63 92.85,2283.28 v2(203.09,2173.04) ; v2(109.85,806.04) 269.85,966.04 901.85,966.04 901.85,1305.41 1111.85,1305.41 v2(1111.85,1515.41) 1525.89,1101.37 1632.52,1101.37 ; v2(304.85,1938.76) ICSP.6 247.37,2040.53 v2(304.85,1983.04) ; U2.8 745.75,2404.53 845.75,2504.53 U2.22 925.85,2504.53 985.76,2444.62 C7.1 ; C9.1 1134.85,1956.13 1111.85,1933.13 v2(1111.85,1622.04) 1632.52,1101.37 ; v2(1396.85,2785.04) 1588.26,2785.04 1700.26,2897.04 ; PS1.3 1632.52,1101.37
  other v1: 2049.64,355.32 2049.64,419.57 48.61,1185.39 147.41,1195.27 1960.7,1284.2 167.19,1289.15 102.96,1323.74 33.79,1387.97 58.49,1462.08 102.96,1526.31 68.36,1659.7 399.4,1783.24 354.94,1807.94 1995.28,1862.28 1871.77,1867.23 1936,1921.57 2005.18,1926.52 1782.84,2050.04 1856.95,2109.33 1945.89,2143.91 1772.95,2178.49 2000.24,2193.32 1866.82,2232.84 1728.48,2287.19 1980.46,2297.07 2015.06,2351.43 43.67,2371.19 1940.95,2386.01 1600.03,2405.78 1728.48,2410.71 1076.3,2430.48 2010.12,2445.3 2079.29,2445.3 206.72,2460.13 1856.94,2465.06 33.78,2507.99 1921.18,2514.48 1728.48,2549.05 201.77,2563.88 1535.79,2568.84 1866.83,2573.77 38.73,2672.58 1936.01,2677.52 310.47,2697.29 201.77,2741.76 1254.17,2751.64 2064.47,2801.05 345.06,2805.99 1733.42,2815.88 429.05,2835.63 453.76,2944.33 1945.89,2969.03 2064.47,2998.68 1861.89,3112.32 1763.08,3146.9 443.87,3161.72 448.82,3265.48 2064.47,3398.88 2271.98,3423.59 2385.62,3423.59 2691.95,3423.59 468.58,3433.47 962.66,3492.76 952.77,3571.8 473.52,3581.7 1476.51,3586.64 1985.41,3591.58 2459.72,3655.8 2232.45,3660.76 2024.94,3665.69 483.4,3670.63 952.77,3680.5
K1: 1.1 K1.1 | length 396.9
  Bottom Layer w90: K1.1 3234.63,409.7 1.1
K2: 1.2 K2.1 | length 376
  Bottom Layer w90: K2.1 3367.85,604.2 3370.21,606.55 1.2
K3: 3.1 K3.1 | length 393.1
  Bottom Layer w90: K3.1 3225.52,895.14 3.1
K4: 3.2 K4.1 | length 377.8
  Bottom Layer w90: K4.1 3365.85,1098.74 3372.61,1091.99 3.2
K5: 5.1 K5.1 | length 389.3
  Bottom Layer w90: K5.1 3216.42,1380.58 5.1
K6: 5.2 K6.1 | length 381.6
  Bottom Layer w90: K6.1 3360.85,1593.29 3376.71,1577.43 5.2
K7: 7.1 K7.1 | length 385.5
  Bottom Layer w90: K7.1 3342.49,1840.56 3367.95,1866.02 7.1
K8: 7.2 K8.1 | length 385.3
  Bottom Layer w90: K8.1 3361.38,2087.83 3386.34,2062.87 7.2
K9: 9.1 K9.1 | length 381.8
  Bottom Layer w90: K9.1 3360.85,2335.11 3377.21,2351.46 9.1
K10: 9.2 K10.1 | length 389.1
  Bottom Layer w90: K10.1 3215.92,2548.31 9.2
K11: 11.1 K11.1 | length 378
  Bottom Layer w90: K11.1 3364.85,2829.65 3372.11,2836.9 11.1
K12: 11.2 K12.1 | length 392.9
  Bottom Layer w90: K12.1 3225.02,3033.75 11.2
NetD1_2: D1.2 R1.1 | length 202.4
  Top Layer w32: v2(2111.85,435.04) 2126.26,449.44 D1.2
  Bottom Layer w32: v2(2111.85,435.04) 2111.85,354.17 R1.1
NetD2_2: D2.2 R2.1 | length 196.8
  Top Layer w32: v2(2118.85,672.04) 2167.42,672.04 D2.2
  Bottom Layer w32: v2(2118.85,672.04) 2118.85,601.44 R2.1
NetD3_2: D3.2 R3.1 | length 164.3
  Top Layer w32: v2(2124.85,906.04) 2124.85,943.99 D3.2
  Bottom Layer w32: v2(2124.85,906.04) 2159.85,871.04 2159.85,848.71 R3.1
NetD4_2: D4.2 R4.1 | length 186.5
  Top Layer w32: v2(2117.85,1108.04) 2116.85,1109.04 2116.85,1179.77 2128.35,1191.26 D4.2
  Bottom Layer w32: v2(2117.85,1108.04) 2129.91,1095.99 R4.1
NetD5_2: D5.2 R5.1 | length 316
  Top Layer w32: D5.2 2116.85,1438.53 2116.85,1314.04 2142.85,1314.04 2154.85,1302.04 v2(2191.75,1302.04)
  Bottom Layer w32: R5.1 2191.75,1343.26 v2(2191.75,1302.04)
NetD6_2: D6.2 R6.1 | length 311
  Top Layer w32: v2(2033.85,1590.53) 2129.13,1685.81 D6.2
  Bottom Layer w32: v2(2033.85,1590.53) R6.1
NetD7_2: D7.2 R7.1 | length 177.5
  Top Layer w32: v2(2118.85,1870.8) 2118.85,1933.08 D7.2
  Bottom Layer w32: v2(2118.85,1870.8) 2151.85,1837.8 R7.1
NetD8_2: D8.2 R8.1 | length 239.3
  Top Layer w32: v2(2087.85,2085.08) 2087.85,2147.04 2121.16,2180.35 D8.2
  Bottom Layer w32: v2(2087.85,2085.08) R8.1
NetD9_2: D9.2 R9.1 | length 209.1
  Top Layer w32: v2(2101.85,2332.35) 2126.85,2427.63 D9.2
  Bottom Layer w32: v2(2101.85,2332.35) R9.1
NetD10_2: D10.2 R10.1 | length 235.9
  Top Layer w32: v2(2071.43,2630.04) 2116.29,2674.9 D10.2
  Bottom Layer w32: v2(2071.43,2630.04) 2121.85,2579.62 R10.1
NetD11_2: D11.2 R11.1 | length 186.1
  Top Layer w32: v2(2116.85,2826.9) 2116.85,2897.04 2141.98,2922.17 D11.2
  Bottom Layer w32: v2(2116.85,2826.9) R11.1
NetD12_2: D12.2 R12.1 | length 356.5
  Top Layer w32: D12.2 2141.85,3169.44 2116.85,3144.44 2116.85,3044.04 v2(2226.85,3044.04)
  Bottom Layer w32: R12.1 2226.85,3074.17 v2(2226.85,3044.04)
NetD13_2: D13.2 R.2 | length 151.7
  Top Layer w32: D13.2 88.85,977.04 151.85,914.04 R.2
NetF1_1: F1.1 PS1.4 | length 1871
  Top Layer w32: F1.1 346.85,689.04 643.18,392.71 PS1.4
R1: D1.1 K1.4 U3.16 | length 3189.3
  Top Layer w32: D1.1 2251.88,374.64 2269.6,356.92 K1.4
  Bottom Layer w23.62: U3.16 1632.1,1809.04 1719.85,1809.04
  Bottom Layer w32: 1719.85,1809.04 2052.85,2142.04 2280.85,2142.04 2315.85,2177.04 2507.85,2177.04 2587.85,2097.04 2587.85,562.92 K1.4
R2: D2.1 K2.4 U3.15 | length 1943.6
  Top Layer w32: v2(1800.85,1749.04) 2026.85,1523.04 2026.85,840.04 2056.85,810.04 2176.01,810.04 K2.4 2264.85,621.91 D2.1
  Bottom Layer w23.62: U3.15 1582.1,1761.04 1594.1,1749.04 v2(1800.85,1749.04)
R3: D3.1 K3.4 U3.14 | length 2227.9
  Top Layer w32: D3.1 2264.85,869.19 2282.57,851.47 K3.4
  Bottom Layer w23.62: 1532.1,1730.8 U3.14
  Bottom Layer w32: 1532.1,1730.8 1621.85,1641.04 2251.85,1641.04 2283.85,1673.04 2511.85,1673.04 2537.85,1647.04 2537.85,1007.47 K3.4
R4: D4.1 K4.4 U3.13 | length 1666.1
  Top Layer w32: D4.1 2264.85,1116.46 2282.57,1098.74 K4.4
  Bottom Layer w23.62: 1482.1,1691.29 U3.13
  Bottom Layer w32: 1482.1,1691.29 1633.35,1540.04 2248.85,1540.04 2264.85,1524.04 2264.85,1215.74 K4.4
R5: D5.1 K5.4 U3.12 | length 1542.3
  Top Layer w32: v2(2091.85,1230.04) 2108.85,1247.04 2282.88,1247.04 K5.4 2282.57,1346.01 2264.85,1363.73 D5.1
  Bottom Layer w23.62: 1432.1,1668.8 U3.12
  Bottom Layer w32: 1432.1,1668.8 1870.85,1230.04 v2(2091.85,1230.04)
R6: D6.1 K6.4 U3.11 | length 1396.4
  Top Layer w32: v2(1382.1,1743.29) 1437.85,1799.04 2176.1,1799.04 K6.4 2282.57,1593.29 2264.85,1611 D6.1
  Bottom Layer w23.62: v2(1382.1,1743.29) U3.11
R7: D7.1 K7.4 U3.10 | length 1442.8
  Top Layer w32: v2(1689.69,1878.88) 1793.89,1983.08 2239.33,1983.08 K7.4 2282.57,1840.56 2264.85,1858.28 D7.1
  Bottom Layer w23.62: U3.10 1332.1,1878.88 v2(1689.69,1878.88)
R8: D8.1 K8.4 U4.16 | length 2203
  Top Layer w32: v2(1304.85,3023.04) 1396.85,3115.04 1701.85,3115.04 1797.85,3019.04 1797.85,2404.04 1950.85,2251.04 2218.64,2251.04 K8.4 2288.96,2087.83 2271.24,2105.55 D8.1
  Bottom Layer w23.62: U4.16 1282.75,3045.15 v2(1304.85,3023.04)
R9: D9.1 K9.4 U4.15 | length 2517.4
  Top Layer w32: v2(1332.75,3221.04) 1478.75,3367.04 1670.85,3367.04 1700.85,3397.04 1700.85,3452.04 1751.85,3503.04 1897.85,3503.04 1999.85,3401.04 2016.85,2541.04 2175.92,2541.04 K9.4 2282.57,2335.11 2264.85,2352.82 D9.1
  Bottom Layer w23.62: U4.15 v2(1332.75,3221.04)
R10: D10.1 K10.4 U4.14 | length 2499.4
  Top Layer w32: D10.1 2326.99,2600.09 2344.71,2582.38 K10.4
  Bottom Layer w23.62: U4.14 1382.75,3241.46
  Bottom Layer w32: 1382.75,3241.46 1492.33,3351.04 2552.87,3351.04 2643.85,3260.06 2643.85,2844.38 K10.4
R11: D11.1 K11.4 U4.13 | length 2060.1
  Top Layer w32: D11.1 2264.85,2847.37 2282.57,2829.65 K11.4
  Bottom Layer w23.62: U4.13 1432.75,3209.04
  Bottom Layer w32: 1432.75,3209.04 1524.75,3301.04 2504.11,3301.04 2587.85,3217.29 2587.85,2997.04 2509.85,2919.04 2471.24,2919.04 K11.4
R12: D12.1 K12.4 U4.12 | length 1711.7
  Top Layer w32: D12.1 2264.85,3094.64 2282.57,3076.92 K12.4
  Bottom Layer w23.62: U4.12 1482.75,3162.04 1571.75,3251.04
  Bottom Layer w32: 1571.75,3251.04 2429.11,3251.04 2537.85,3142.29 2537.85,3047.04 2511.85,3021.04 2437.74,3021.04 K12.4
RESET: ICSP.5 R13.2 SW1.3 SW1.4 U2.1 | length 1900.1
  Top Layer w32: ICSP.5 203.09,1959.28 263.85,2020.04 263.85,2856.16 SW1.3 ; SW1.4 220.44,3027.46 221.85,3026.04 SW1.3 ; R13.2 461.85,3081.75 ; U2.1 484.63,3104.53 461.85,3081.75 ; SW1.3 376.97,2898.16 404.85,2926.04 404.85,3024.75 461.85,3081.75
VCC: C3.1 C4.2 C7.2 ICSP.2 U1.2 U1.4 U2.7 U2.20 | length 4470.2
  Top Layer w32: ICSP.2 46.85,1996.76 46.85,2190.04 v2(208.85,2352.04) ; v2(802.85,2537.07) 813.85,2526.07 813.85,1788.04 823.85,1788.04 ; U2.20 872.34,2304.53 823.85,2256.04 823.85,1788.04 ; U1.2 U1.4 ; C4.2 1785.53,1458.72 C3.1 1751.85,1425.04 1483.55,1425.04 U1.4 ; 823.85,1788.04 823.85,1778.04 851.85,1750.04 1290.85,1750.04 1483.55,1557.35 U1.4
  Bottom Layer w27.56: 1010.58,2338.26 C7.2
  Bottom Layer w32: v2(208.85,2352.04) 361.34,2504.53 U2.7 770.31,2504.53 v2(802.85,2537.07) ; U2.20 976.85,2304.53 1010.58,2338.26
  other v1: 1157.75,1389.53 1548.5,1473.81 531.75,1593.16 1711.8,1693.98
XTAL1: C5.2 U2.9 Y1.2 | length 649.2
  Top Layer w32: v2(332.85,2394.04) 373.85,2435.04 424.76,2435.04 Y1.2 424.76,2552.04 389.4,2587.4 C5.2
  Bottom Layer w32: v2(332.85,2394.04) 422.37,2304.53 U2.9
XTAL2: C6.2 U2.10 Y1.1 | length 415.7
  Top Layer w32: C6.2 460.11,2147.04 Y1.1@443.66,2204.53 ; U2.10 Y1.1@443.66,2204.53 ; Y1.1@443.66,2204.53 424.76,2204.53 Y1.1 Y1.1@443.66,2204.53
pads on no net: U2.21 U4.6 U4.7 U4.10 U4.11

## Polygon pours and split planes (outlines as drawn)
GND on Top Layer "GND_L01_P035" (solid, remove dead copper, pour order 35): 2712.11,3722.88 2712.11,240.81 788.38,246.2 648.67,934.01 444.47,939.39 -1.53,595.48 -17.65,3916.34
no net on Top Layer "NONET_L01_P032" (solid, pour order 32): 2800.57,3720.58 3295.28,3720.58 ccw(c3295.28,3820.58) 3395.28,3820.58 3395.28,3849.24 cw(c3442.54,3849.24) 3442.55,3896.5 3819.33,3896.5 cw(c3819.33,3807.23) 3908.6,3807.23 3908.6,94.76 cw(c3808.61,94.76) 3808.6,-5.24 3461.17,-5.24 3400.33,35.31 3394.15,61.79 3394.15,94.76 3394.15,158.39 3371.37,209.08 3319.29,241.39 2762.79,241.39 2762.79,3759.98
no net on Top Layer "NONET_L01_P044" (solid, pour order 44): 1.59,561.81 60.62,602.46 ccw(c35.54,696.39) 119.69,647.7 434.12,888.51 cw(c497.07,825.56) 497.07,914.58 631.98,914.58 759.29,242.78 417.24,245.84 ccw(c427.4,150.37) 352.71,210.69 ccw(c406.53,151.68) 326.75,155.34 326.75,63.31 cw(c259.27,63.31) 259.27,-4.16 81.35,-4.16 cw(c81.35,-2.63) 79.81,-2.63 cw(c79.81,75.59) 1.59,75.59
VCC on Top Layer "VCC_L01_P001" (solid, remove dead copper, pour order 1): 498.84,1219.69 498.84,1750.91 2031.2,1750.91 2031.2,1222.25 497.56,1222.25
GND on Bottom Layer "GND_L02_P036" (solid, remove dead copper, pour order 36): 2706.74,3722.88 2717.49,246.2 777.63,246.2 648.67,928.64 455.22,934.01 -6.91,590.11 -1.53,3916.34
no net on Bottom Layer "NONET_L02_P039" (solid, pour order 39): 1.89,559.09 158.55,659.09 285.1,743.76 ccw(c243.51,806.01) 305.77,764.42 ccw(c259.79,833.24) 328.61,787.26 ccw(c298.44,832.41) 343.59,802.25 ccw(c311.22,850.7) 359.68,818.33 449.15,907.81 cw(c456.73,907.81) 456.73,915.39 626.04,915.39 754.91,238.17 ccw(c742.72,225.99) 742.71,243.22 403.67,243.22 375.97,229.61 352.98,208 ccw(c437.61,141) 330.39,128.52 330.39,56.23 315.57,34.17 308.62,22.4 301.47,15.24 285.91,4.51 cw(c250.11,51.86) 241.93,-6.93 79.77,-6.93 cw(c79.76,10.29) 67.59,-1.89 31.76,10.95 cw(c130.64,94.15) 1.89,105.23 1.89,561.62
no net on Bottom Layer "NONET_L02_P034" (solid, pour order 34): 2787.74,3719.41 3295.92,3719.41 ccw(c3295.92,3819.41) 3395.92,3819.41 3395.92,3849.73 cw(c3440.82,3849.73) 3440.82,3894.63 3824.94,3894.63 cw(c3824.94,3812.33) 3907.24,3812.33 3907.24,80.82 cw(c3822.46,80.82) 3822.46,-3.97 3473.23,-3.97 cw(c3473.23,73.35) 3395.92,73.35 3395.92,168.13 3360.91,219.68 3295.14,244.35 3131.52,244.35 2863.5,244.35 cw(c2825.62,282.23) 2787.74,244.35 2787.31,3720.03
VCC on Bottom Layer "VCC_L02_P003" (solid, remove dead copper, pour order 3): 494.7,1214.39 2068.49,1214.39 2068.49,1759.66 496.13,1759.66

## Keep-outs
Keep-Out Layer:
  lines w5: 1904.74,3719.99 1904.71,3719.99 ; -2.5,3794.08 cw(c-0.01,3794.27) -2.51,3794.27 ; -2.5,3794.08 cw(c-0.01,3794.27) -2.51,3794.27 ; -2.5,3794.08 cw(c-0.01,3794.27) -2.51,3794.27 ; -2.5,3794.08 cw(c-0.01,3794.27) -2.51,3794.27 ; -2.5,3794.08 -0.73,3770.43 ; -2.5,3794.08 -0.73,3770.43 ; -2.51,3794.27 cw(c99.99,3794.27) 99.99,3896.77 ; -2.51,3794.27 cw(c99.99,3794.27) 99.97,3896.77 ; -0.73,85.01 ccw(c89.84,85.03) 93.62,-5.46 ; -0.73,85.01 cw(c89.84,85.03) -0.73,85.03 ; -0.73,85.01 cw(c1.77,85.03) -0.73,85.03 ; -0.73,85.03 ccw(c89.84,85.03) 93.62,-5.46 ; -0.73,85.03 ccw(c1.77,85.03) -0.73,85.03 ; -0.73,85.03 -0.73,3770.43 ; -0.73,85.03 -0.73,85.03 ; -0.73,85.03 -0.73,3770.43 ; 93.62,-5.46 245.4,-5.46 ; 93.62,-5.46 245.4,-5.46 ; 99.97,3896.77 cw(c99.99,3794.27) 99.99,3896.77 ; 99.97,3896.77 cw(c99.99,3894.27) 99.99,3896.77 ; 99.97,3896.77 314.51,3896.77 ; 99.99,3896.77 ccw(c99.99,3894.27) 99.99,3896.77 ; 99.99,3896.77 314.51,3896.77 ; 99.99,3896.77 99.99,3896.77 ; 245.4,-5.46 ccw(c247.43,77.16) 330.05,75.11 ; 245.4,-5.46 cw(c247.43,77.16) 245.37,-5.46 ccw(c247.42,77.17) 245.4,-5.46 ; 245.4,-5.46 ccw(c247.42,77.17) 330.05,75.09 ; 245.4,-5.46 245.43,-5.46 245.4,-5.46 ; 314.51,3896.77 cw(c314.51,3825.17) 314.53,3896.77 ; 314.51,3896.77 cw(c314.51,3894.27) 314.53,3896.77 ; 314.51,3896.77 cw(c314.51,3825.17) 314.53,3896.77 ; 314.51,3896.77 cw(c314.51,3894.27) 314.53,3896.77 ; 314.53,3896.77 cw(c314.51,3825.17) 386.1,3825.96 ; 314.53,3896.77 cw(c314.51,3825.17) 386.1,3825.96 ; 330.05,75.11 ccw(c327.55,75.18) 330.05,75.18 ; 330.05,75.11 ccw(c327.55,75.18) 330.05,75.18 ; 330.05,75.11 ccw(c327.55,75.18) 330.05,75.18 ; 330.05,75.09 ccw(c327.55,75.18) 330.05,75.18 ; 330.05,75.09 ccw(c247.42,77.17) 330.05,75.11 ; 330.05,75.18 ccw(c327.55,75.18) 330.05,75.18 ; 330.05,75.18 330.05,144.35 ; 330.05,75.18 330.05,144.35 ; 330.05,144.35 cw(c427.53,144.36) 427.55,241.85 ; 330.05,144.35 ccw(c327.55,144.35) 330.05,144.35 ; 330.05,144.35 ccw(c327.55,144.35) 330.05,144.35 ; 330.05,144.36 ccw(c427.54,144.36) 330.05,144.35 ; 330.05,144.36 cw(c427.54,144.36) 427.54,241.85 ; 330.05,144.35 ccw(c327.55,144.35) 330.05,144.35 ; 330.05,144.35 ccw(c327.55,144.35) 330.05,144.35 ; 330.05,144.35 ccw(c327.55,144.35) 330.05,144.35 ; 330.05,144.35 330.05,144.36 ; 386.1,3825.96 391.99,3817.45 ; 386.1,3825.96 391.98,3817.48 ; 391.98,3817.48 cw(c389.94,3816.03) 392.44,3816.07 ; 391.98,3817.48 392,3817.45 ; 391.99,3817.45 cw(c389.94,3816.03) 392.44,3816.07 ; 391.99,3817.45 cw(c389.94,3816.03) 392.44,3816.04 ; 391.99,3817.45 cw(c389.94,3816.03) 392.44,3816.03 ; 392.44,3816.03 ccw(c389.94,3816.03) 392.44,3816.04 ; 392.44,3816.04 ccw(c489.93,3817.49) 489.93,3719.99 ; 392.44,3816.07 ccw(c489.93,3817.49) 392.44,3816.04 ; 392.44,3816.07 ccw(c489.93,3817.49) 489.93,3719.99 ; 427.55,241.85 ccw(c427.55,244.35) 427.57,241.85 ; 427.55,241.85 ccw(c427.55,244.35) 427.55,241.85 ; 427.55,241.85 ccw(c427.55,244.35) 427.55,241.85 ; 427.55,241.85 ccw(c427.55,244.35) 427.55,241.85 ; 427.55,241.85 ccw(c427.55,244.35) 427.55,241.85 ; 427.55,241.85 ccw(c427.54,144.36) 427.54,241.85 ; 427.57,241.85 3295.14,241.85 ; 427.55,241.85 427.57,241.85 ; 427.54,241.85 3295.11,241.85 ; 427.54,241.85 427.54,241.85 ; 489.93,3719.99 cw(c489.93,3717.49) 489.95,3719.99 ; 489.93,3719.99 1601.25,3719.99 1607.51,3726.26 ; 489.93,3719.99 489.93,3719.99 ; 489.93,3719.99 489.95,3719.99 ; 489.95,3719.99 3300.33,3719.99 3300.33,3719.99 ; 1607.51,3726.26 cw(c1609.28,3724.49) 1609.34,3726.99 ; 1607.51,3726.26 cw(c1609.28,3724.49) 1609.34,3726.99 ; 1609.34,3726.99 1904.71,3719.99 ; 1904.71,3719.99 3300.33,3719.99 ; 1904.68,3719.99 1904.71,3719.99 ; 3295.11,241.85 ccw(c3295.14,244.35) 3295.14,241.85 ; 3295.11,241.85 3295.14,241.85 ; 3295.14,241.85 ccw(c3295.14,244.35) 3295.14,241.85 ; 3295.14,241.85 ccw(c3295.14,244.35) 3295.14,241.85 ; 3295.14,241.85 ccw(c3295.14,144.36) 3295.14,241.85 ; 3295.14,241.85 cw(c3295.14,144.36) 3392.64,144.36 ; 3295.14,241.85 cw(c3295.14,144.36) 3392.64,144.36 ; 3295.14,241.85 3295.14,241.85 ; 3300.33,3719.99 ccw(c3300.33,3817.49) 3397.83,3817.49 ; 3300.33,3719.99 ccw(c3300.33,3817.49) 3397.83,3817.49 ; 3300.33,3719.99 3300.33,3719.99 ; 3392.64,90.59 ccw(c3481.95,83.85) 3475.11,-5.45 ; 3392.64,90.59 ccw(c3481.95,83.85) 3475.11,-5.45 ; 3392.64,90.59 3392.64,144.33 ; 3392.64,90.59 3392.64,144.32 ; 3392.64,144.35 ccw(c3295.14,144.36) 3392.64,144.36 ; 3392.64,144.35 ccw(c3395.14,144.35) 3392.64,144.33 ; 3392.64,144.35 ccw(c3295.14,144.36) 3392.64,144.36 ; 3392.64,144.35 ccw(c3395.14,144.35) 3392.64,144.32 ; 3392.64,144.35 ccw(c3395.14,144.35) 3392.64,144.32 ; 3392.64,144.33 3392.64,144.35 ; 3392.64,144.32 3392.64,144.35 ; 3397.83,3817.49 ccw(c3400.33,3817.49) 3397.83,3817.49 ; 3397.83,3817.49 ccw(c3400.33,3817.49) 3397.83,3817.49 ; 3397.83,3817.49 ccw(c3400.33,3817.49) 3397.83,3817.49 ; 3397.83,3817.51 ccw(c3400.33,3817.49) 3397.83,3817.49 ; 3397.83,3817.49 3397.83,3844.71 ; 3397.83,3817.49 3397.83,3817.49 ; 3397.83,3817.51 3397.83,3844.71 ; 3397.83,3817.49 3397.83,3817.51 ; 3397.83,3844.71 cw(c3452.15,3844.71) 3452.15,3899.04 ; 3397.83,3844.71 cw(c3452.15,3844.71) 3452.13,3899.04 ; 3397.83,3844.71 3397.83,3844.71 ; 3452.15,3899.04 cw(c3452.15,3896.54) 3452.29,3899.04 ; 3452.15,3899.04 ccw(c3452.15,3896.54) 3452.15,3899.04 ; 3452.15,3899.04 cw(c3452.15,3896.54) 3452.29,3899.04 ; 3452.15,3899.04 cw(c3452.15,3896.54) 3452.29,3899.04 ; 3452.13,3899.04 cw(c3452.15,3896.54) 3452.29,3899.04 ; 3452.15,3899.04 ccw(c3452.15,3844.71) 3452.13,3899.04 ; 3452.29,3899.04 3492.64,3896.77 ; 3452.29,3899.04 3492.64,3896.77 ; 3475.11,-5.45 ccw(c3475.3,-2.96) 3475.3,-5.46 ; 3475.11,-5.45 ccw(c3475.3,-2.96) 3475.3,-5.46 ; 3475.11,-5.45 ccw(c3475.3,-2.96) 3475.3,-5.46 ; 3475.3,-5.46 3808.24,-5.46 ccw(c3808.24,97.04) 3910.74,97.04 3910.75,341.68 3910.74,3543.86 3910.74,3794.27 ; 3475.3,-5.46 3669.49,-5.46 ; 3492.64,3896.77 3699.3,3896.77 3808.24,3896.77 ; 3492.64,3896.77 3669.49,3896.77 ; 3669.49,-5.46 ccw(c3669.49,97.04) 3669.49,-5.46 ; 3669.49,-5.46 3669.49,-5.46 ; 3669.49,3896.77 ccw(c3669.49,3794.27) 3669.49,3896.77 ; 3669.49,3896.77 ccw(c3669.49,3794.27) 3669.49,3896.77 ; 3669.49,3896.77 3669.49,3896.77 ; 3669.49,3896.77 3669.49,3896.77 ; 3808.27,3896.77 ccw(c3808.24,3894.27) 3808.24,3896.77 ; 3808.27,3896.77 ccw(c3808.24,3794.27) 3808.24,3896.77 ; 3808.27,3896.77 cw(c3808.24,3794.27) 3910.74,3794.29 ; 3910.74,3794.27 ccw(c3808.24,3794.27) 3910.74,3794.29 ; 3910.74,3794.27 ccw(c3908.24,3794.27) 3910.74,3794.29 ; 2738.99,428.81 2738.99,3468.32 2739.37,3468.32 2738.99,3467.94 2738.99,3453.12 2738.99,3444.66 2738.99,428.81

## Silkscreen, mask and mechanical layers (free items; w line width, h text height)
Top Overlay:
  lines w10: 713.2,3651.75 732.38,3670.94 736.53,3670.94 1108.57,3670.94 ; 1351.56,3670.94 1696.15,3670.94 1697.56,3670.94 1718.11,3650.38 ; 3839.81,411.92 3854.85,426.96 3854.85,442.99 3854.85,1583.57 ; 3842.17,2998.29 3854.85,2985.61 3854.85,2983.25 ; 3854.85,1823.3 3854.85,2982.06 3854.85,2984.44 ; 3854.85,2984.44 3854.85,2984.44
  text "SENSORS" at 1345.02,3698.43 h35 r180
  text "A5" at 1111.53,3692.21 h60 r180
  text "A1" at 1662.74,3691.11 h60 r180
  text "8" at 643.37,3690.45 h60 r180
  text "A0" at 1865.91,3690.44 h60 r180
  text "+5v" at 401.55,3688.81 h35 r180
  text "7" at 860.66,3687.59 h60 r180
  text "A4" at 1422.48,3687.58 h60 r180
  text "-" at 70.71,3643.52 h35
  text "Gihad Mohamed" at 2041.85,3477.04 h100
  text "12" at 3823.5,2992.95 h60 r90
  text "10" at 3823.17,2495.3 h60 r90
  text "8" at 3823.17,2059.42 h60 r90
  text "OUTPUT" at 3882.35,1590.66 h35 r90
  text "6" at 3823.17,1565.4 h60 r90
  text "4" at 3825.22,1086.5 h30 r90
  text "2" at 3821.97,599.14 h30 r90
  text "2" at 3955.02,210.53 h30 r90
Bottom Overlay:
  text "Gihad Mohamed" at 3249.27,3477 h100

## Text inside footprints (layer, text, board x,y; h text height)
C1: Top Overlay "+" at 946.54,1616.2 h35 r90
C3: Top Overlay "+" at 1796.54,1616.2 h35 r90